# Altium PCB PCB_RoverLite_v1.PcbDoc
Units mm, origin at the board's own origin, x right, y up, seen from the top; angles counter-clockwise.
Board outline 75 x 80 mm, 2 copper layers (Top Layer, Bottom Layer); 22 components, 15 nets, 109 pads, 128 vias.
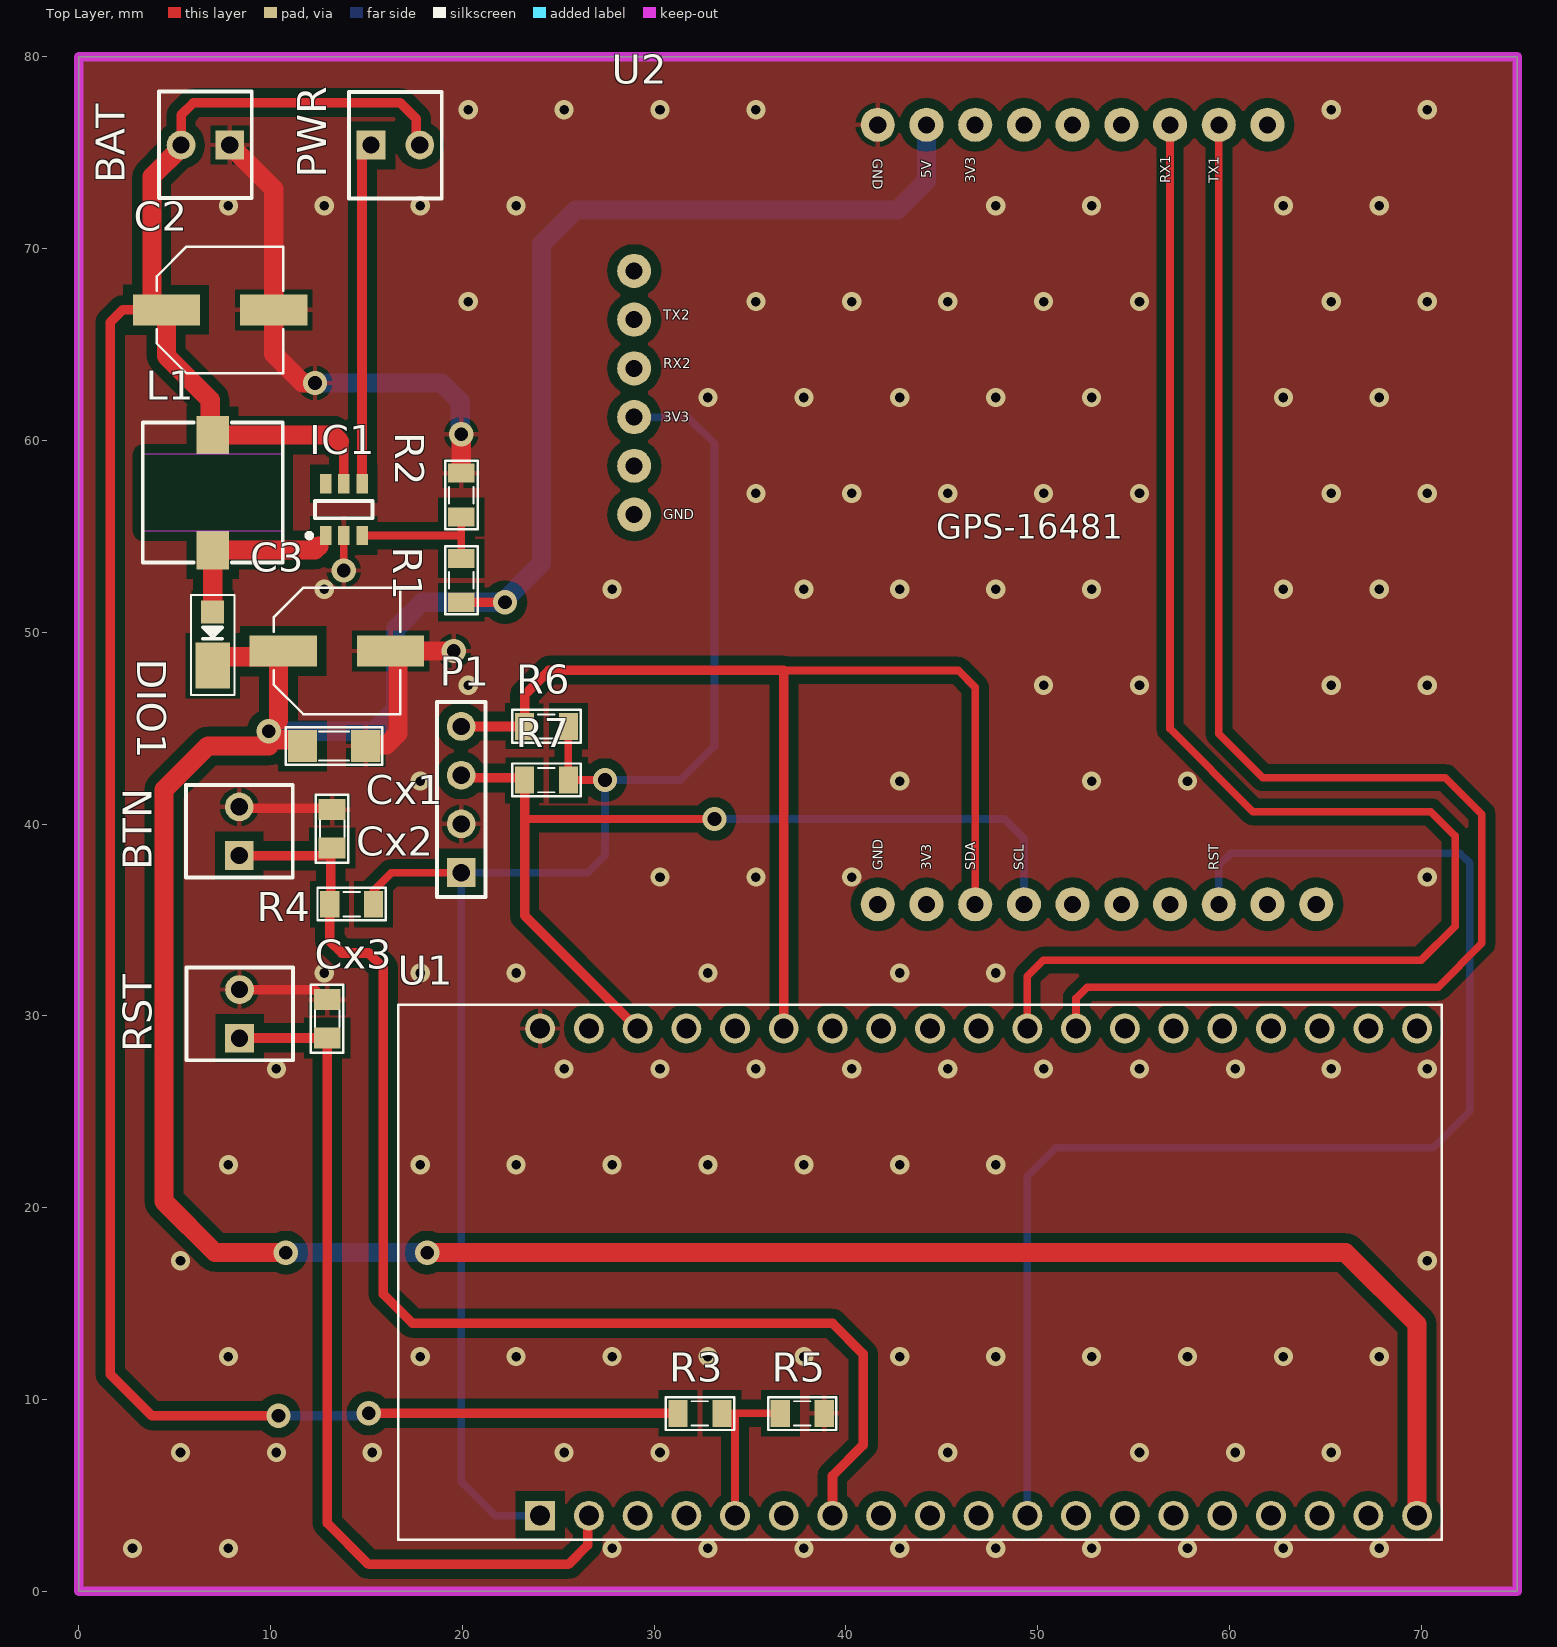
[diagram p0: Top Layer view]
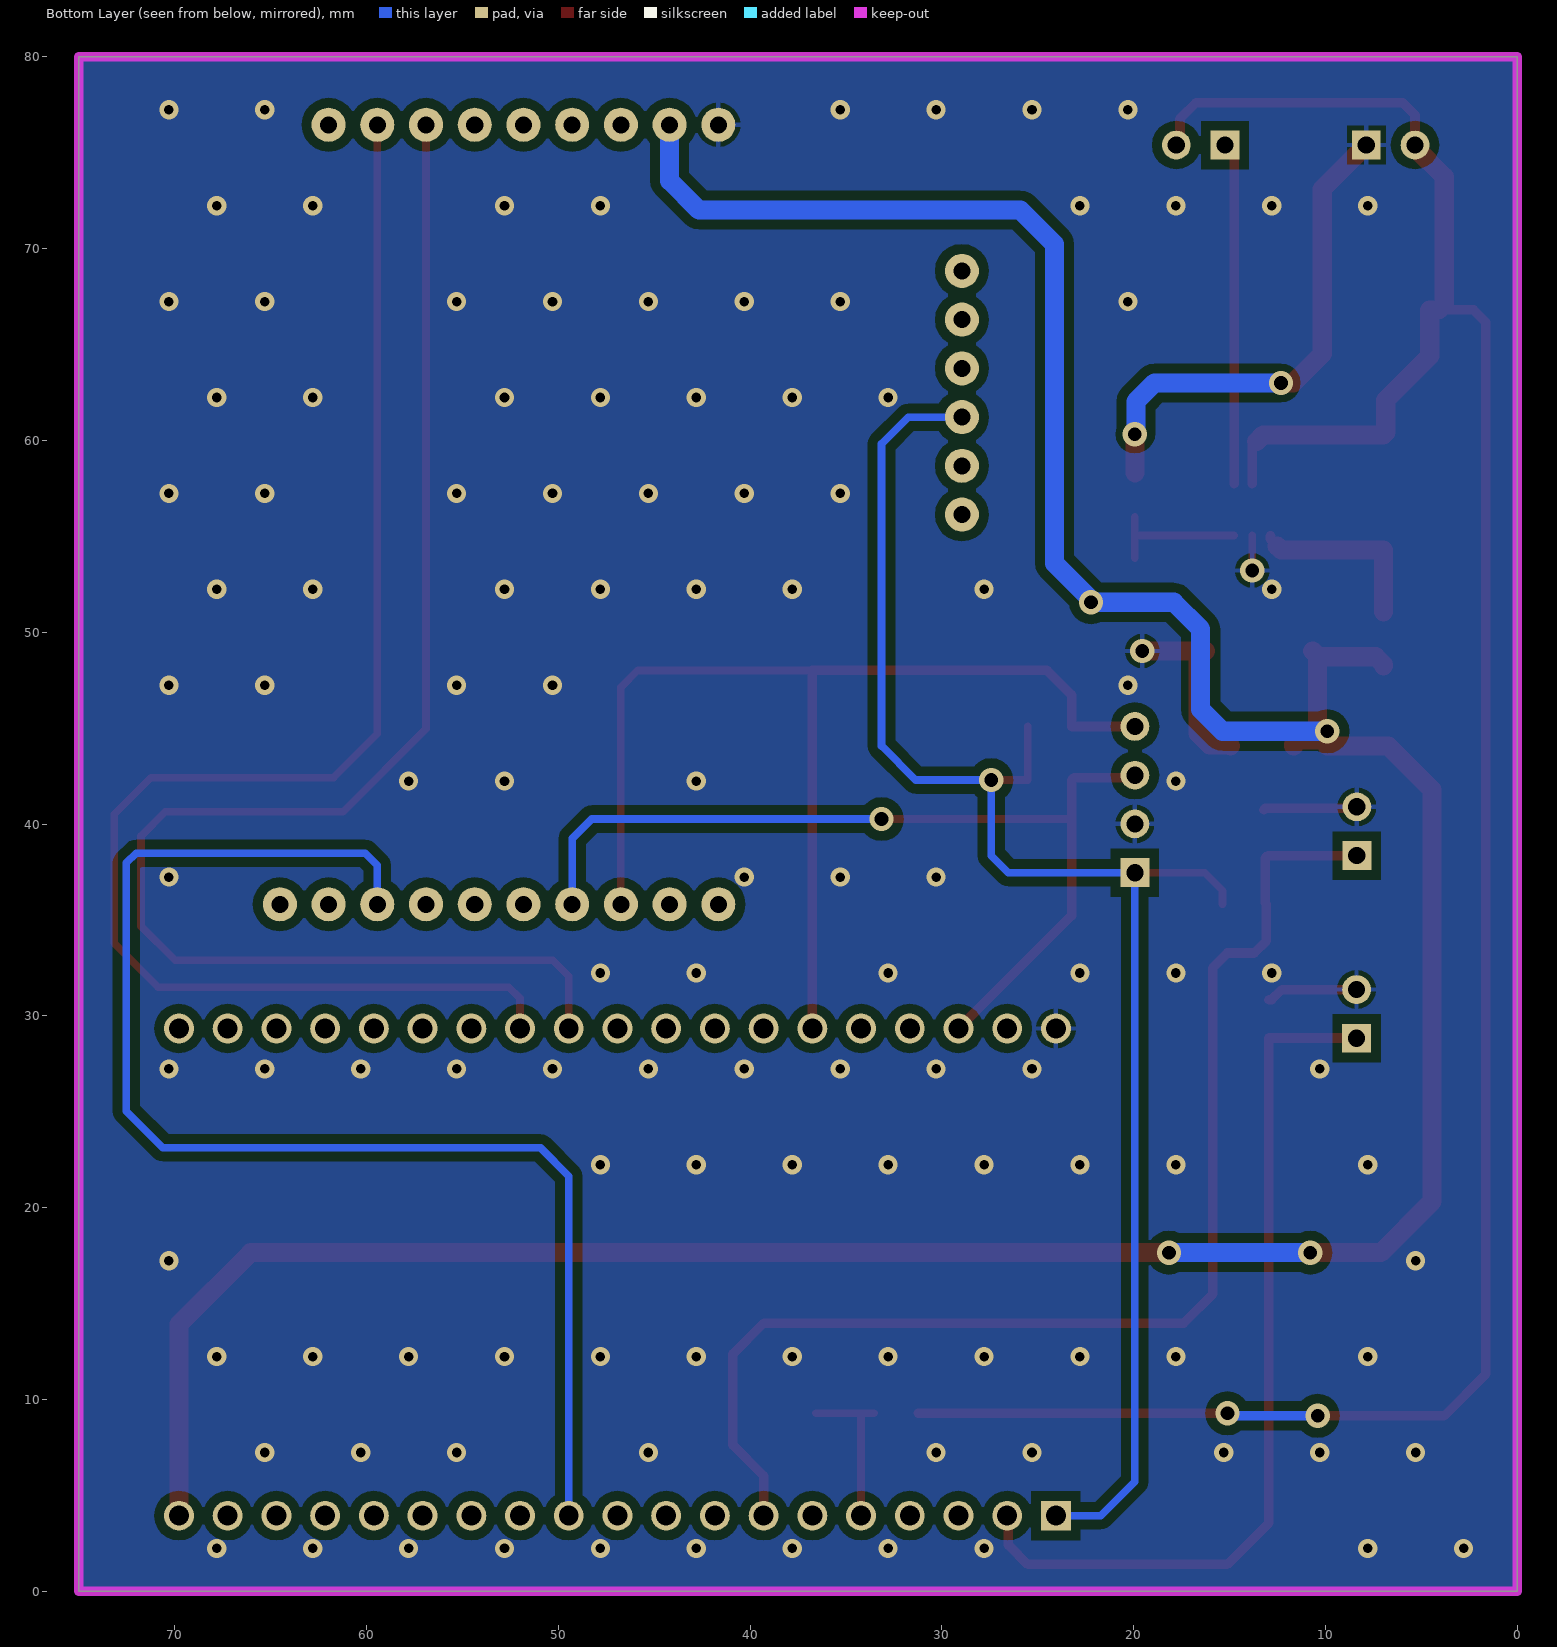
[diagram p1: Bottom Layer view, seen from below]
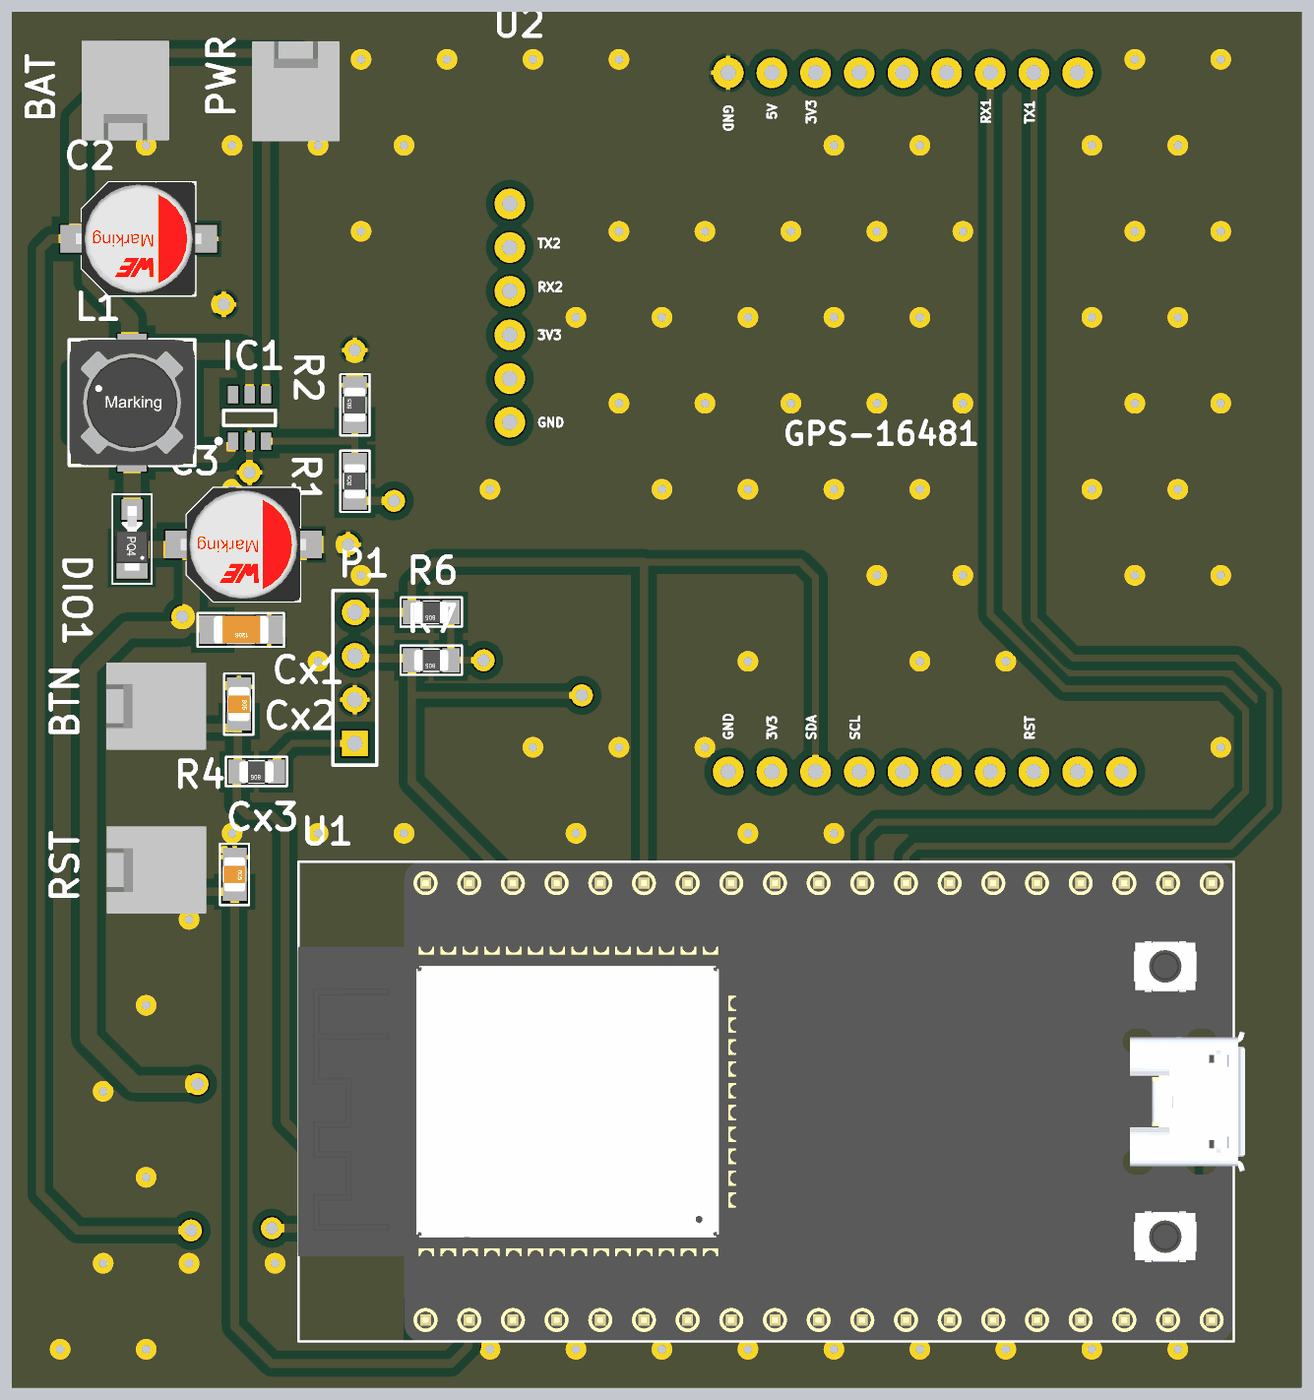
[diagram p2: 3D render of the assembled board from above, using the file's embedded part models]

## Layer stack, top to bottom
Top Solder: solder mask 0.0102, Solder Resist, Dk 3.5
Top Layer: signal copper 0.0356
Dielectric 1: dielectric 0.32, FR-4, Dk 4.8
Bottom Layer: signal copper 0.0356
Bottom Solder: solder mask 0.0102, Solder Resist, Dk 3.5

## Board outline
0,0 0,80 75,80 75,0

## Design rules (kind name [scope] priority, off if disabled: settings)
Clearance [All] p1: gap=0.2 ignorepadtopadclearanceinfootprint=FALSE except(0.5: Arc-Poly Track-Poly SMDPad-Poly THPad-Poly Via-Poly Fill-Poly Poly-Poly)
PolygonConnect [All] p1: connectstyle=Relief reliefconductorwidth=0.254 reliefentries=4 polygonreliefangle="90 Angle" airgapwidth=0.254
RoutingVias [All] p1: holewidth=0.711 width=1.27 viastyle="Through Hole" minholewidth=0.711 minwidth=1.27 maxholewidth=0.711 maxwidth=1.27
SolderMaskExpansion [All] p1: expansion=0.102
Width [All] p1: maxlimit=1 minlimit=0.2 preferedwidth=0.4
30 further rules are at their usual default settings.

## Components (designator, comment, footprint, x,y, rotation, side; value= is the part's Value field where it differs from the comment)
BAT "Bat_in" HDR2 7.874,75.398 r180 top (schematic designator C1)
BTN "cmd btn" HDR2 8.366,38.354 r90 top (schematic designator C5)
C2 "22uF" CAP-ALU-SMD-6.3x7.7x2.2 7.366,66.802 r0 top
C3 "22uF" CAP-ALU-SMD-6.3x7.7x2.2 13.462,49.022 r0 top
Cx1 "104pF" CN-SMD-1206 13.335,44.069 r180 top value=33pF
Cx2 "104pF" CN-SMD-0805 13.208,39.751 r270 top value=33pF
Cx3 "104pF" CN-SMD-0805 12.954,29.845 r270 top value=33pF
DIO1 "SS34" DIO-SMD-216AA 6.985,49.276 r270 top value=1N5007
IC1 "SX1308-Boost 2A" SX1308fpt 13.818,56.388 r90 top
L1 "10 uH" L-SMD-M-7.3x4.5 6.985,57.277 r180 top
P1 "OLED plug" HDR1X4 19.939,37.465 r90 top
PWR "PowerOn/Off" HDR2 15.24,75.398 r0 top (schematic designator C4)
R1 "22k" RES-SMD-0805 19.939,52.705 r90 top
R2 "3k" RES-SMD-0805 19.939,57.15 r90 top
R3 "22k" RES-SMD-0805 32.385,9.271 r0 top
R4 "10k" RES-SMD-0805 14.224,35.814 r180 top
R5 "22k" RES-SMD-0805 37.719,9.271 r0 top
R6 "4k7" RES-SMD-0805 24.384,45.085 r180 top
R7 "4k7" RES-SMD-0805 24.384,42.291 r180 top
RST "RST btn" HDR2 8.382,28.829 r90 top (schematic designator C6)
U1 "ESP32-DEVKITC-32D" MODULE_ESP32-DEVKITC-32D 43.815,16.637 r90 top
U2 "ZED-F9P-SPARKFUN-Breakout board" GPS-16481 27.686,34.544 r0 top

## Footprints (in the part's own frame and the unit in brackets; to place one, negate y for a bottom-side part, rotate by r counter-clockwise, add the part's x,y. Pads: shape width x height; smd on the part's side, far side on the other; paste and mask are expansions set on the pad)
CAP-ALU-SMD-6.3x7.7x2.2 [mm]
  rect 3.5x1.6 smd: 1(-2.8,0) 2(2.8,0)
  silkscreen extent -3.3,-3.3 3.3,3.3, body extent -3.65,-3.3 3.65,3.3, height 7.65
CN-SMD-0805 [mm]
  rect 1.1x1.397 smd: 1(-1,0) 2(1,0)
  silkscreen extent -1.78,-0.86 1.78,0.84, body extent -1,-0.62 1,0.63, height 0.8
CN-SMD-1206 [mil]
  rect 60x65 smd: 1(-64,0) 2(66,0)
  silkscreen extent -98,-38 100,39, body extent -63,-31 63,32, height 40
DIO-SMD-216AA [mm] "DO216AA ST-MITE"
  rect 1.2x1.2 smd: 1(-1.778,0)
  rect 2.4x1.8 smd: 2(1.022,0)
  silkscreen extent -2.67,-1.14 2.54,1.14, body extent -1.99,-0.95 1.77,0.95, height 1.02
GPS-16481 [mil]
  round 70 hole 35: 1(550,1650) 2(650,1650) 3(750,1650) 4(850,1650) 5(950,1650) 6(1050,1650) 7(1150,1650) 8(1250,1650) 9(1350,1650) 10(1450,50) 11(1350,50) 12(1250,50) 13(1150,50) 14(1050,50) 15(950,50) 16(850,50) 17(750,50) 18(650,50) 19(550,50) 20(50,850) 21(50,950) 22(50,1050) 23(50,1150) 24(50,1250) 25(50,1350)
HDR1X4 [mm] "Connector; Header; 4 Position"
  rect 1.5x1.5 hole 0.9: 1(0,0)
  round 1.5 hole 0.9: 2(2.54,0) 3(5.08,0) 4(7.62,0)
  silkscreen extent -1.27,-1.27 8.89,1.27
HDR2 [mm] "Connector; Header; 2 Position"
  rect 1.5x1.5 hole 0.9: 1(0,0)
  round 1.5 hole 0.9: 2(2.54,0)
  silkscreen extent -1.14,-2.79 3.68,2.77, body extent -1.27,-2.92 3.81,2.88, height 11.72
L-SMD-M-7.3x4.5 [mm] "WE-PDA SMD Shielded Power Inductor, 7345"
  rect 1.7x2 smd: 1(0,3) 2(0,-3)
  Top Layer keep-out region: -3.65,-2 3.65,-2 3.65,2 -3.65,2
  silkscreen extent -3.65,-3.65 3.65,3.65, body extent -3.65,-3.65 3.65,3.65, height 4.05
MODULE_ESP32-DEVKITC-32D [mm]
  rect 1.56x1.56 hole 1.04: 1(-12.7,19.76)
  round 1.56 hole 1.04: 2(-12.7,17.22) 3(-12.7,14.68) 4(-12.7,12.14) 5(-12.7,9.6) 6(-12.7,7.06) 7(-12.7,4.52) 8(-12.7,1.98) 9(-12.7,-0.56) 10(-12.7,-3.1) 11(-12.7,-5.64) 12(-12.7,-8.18) 13(-12.7,-10.72) 14(-12.7,-13.26) 15(-12.7,-15.8) 16(-12.7,-18.34) 17(-12.7,-20.88) 18(-12.7,-23.42) 19(-12.7,-25.96) 20(12.7,19.76) 21(12.7,17.22) 22(12.7,14.68) 23(12.7,12.14) 24(12.7,9.6) 25(12.7,7.06) 26(12.7,4.52) 27(12.7,1.98) 28(12.7,-0.56) 29(12.7,-3.1) 30(12.7,-5.64) 31(12.7,-8.18) 32(12.7,-10.72) 33(12.7,-13.26) 34(12.7,-15.8) 35(12.7,-18.34) 36(12.7,-20.88) 37(12.7,-23.42) 38(12.7,-25.96)
  silkscreen extent -13.95,-27.25 13.95,27.15, body extent -13.97,-27.9 13.97,27.2, height 3.25
RES-SMD-0805 [mil]
  rect 39.37x55 smd: 1(-45,0) 2(45,0)
  silkscreen extent -70,-34 70,33, body extent -39,-25 39,25, height 31
SX1308fpt [mm] "SOT23, 6-Leads, Body 2.90x2.80mm, Pitch 0.95mm, IPC Medium Density"
  rect 1x0.6 smd: 1(-1.35,0.95) 2(-1.35,0) 3(-1.35,-0.95) 4(1.35,-0.95) 5(1.35,0) 6(1.35,0.95)
  silkscreen extent -1.47,-1.5 0.45,1.92, body extent -0.85,-1.5 0.85,1.5, height 1.45

## Part data
BAT BTN PWR RST: library part Header2, "Header IDC, 2 x 1 Pin Vertical 2.54mm Pitch (Non-Boxed, Male)", Manufacturer="Würth Elektronik eiSos GmbH", partNo=613002143121, ComponentLink1 Description=Manufacturer, ComponentLink1URL=http://www.we-online.com, ComponentLink2 Description=Datasheet, ComponentLink2URL=http://katalog.we-online.de/em/datasheet/6130xx143121.pdf, Created by="Karrer Zheng", Created Date="29 March 2013", NoPins=02
C2 C3: library part CN-ALU-SMD, "Polarized Capacitor (Axial)", LatestRevisionDate=17-Jul-2002, LatestRevisionNote="Re-released for DXP Platform.", PackageReference=POLAR0.8, Published=8-Jun-2000, Publisher="Altium Limited"
Cx1 Cx2 Cx3: library part CN
DIO1: library part "Diode SMD", "Default Diode", Code - JEDEC=DO-214-AB, Published=8-Jun-2000, Publisher="Altium Limited", Revision="July-2002: Re-released for DXP Platform."
L1: library part L-SMD-1, Inductance="1.0 礖", Manufacturer="Wurth Elektronik", partNo=78477010, ComponentLink1Description=Manufacturer, ComponentLink1URL=http://www.we-online.de, ComponentLink2Description=Datasheet, ComponentLink2URL=http://katalog.we-online.de/pbs/datasheet/78477010.pdf, Created by="Baojun Chen", Created Date=Nov.2015
P1: library part "Header 4", "Header, 4-Pin", LatestRevisionDate=17-Jul-2002, LatestRevisionNote="Re-released for DXP Platform.", Publisher="Altium Limited"
R1 R2 R3 R4 R5 R6 R7: library part Res-SMD, "Resistor", Manufacturer="Generic Components", Class=Passive, Published=08/06/2000, Publisher="Altium Hobart Technology Centre"
U1: "EVAL BOARD FOR ESP-WROOM-32", Package=None, Availability=Warning, Check_prices=https://www.snapeda.com/parts/ESP32-DEVKITC-32D/Espressif%20Systems/view-part/2777395/?ref=eda, MF="Espressif Systems", MP=ESP32-DEVKITC-32D, Price=None, Purchase-URL=https://pricing.snapeda.com/search/part/ESP32-DEVKITC-32D/?ref=eda, SnapEDA_Link=https://www.snapeda.com/parts/ESP32-DEVKITC-32D/Espressif%20Systems/view-part/2777395/?ref=snap

## Via types
v1: diameter 1, hole 0.5, Top Layer to Bottom Layer, 116 vias
v2: diameter 1.27, hole 0.711, Top Layer to Bottom Layer, 12 vias

## Nets (pads, with @x,y where several pads share a name; then routed paths per layer and width w, separated by ;. In a path a pad name is that pad's centre, name@x,y a point inside that pad or via, vN(x,y) a via of type N, cw(c..) or ccw(c..) an arc to the next point about the centre after c; other vN are vias at no path point)
3V3: P1.1 R4.1 R6.1 R7.1 U1.1 U2.22 | length 85.7
  Top Layer w0.4: R4.1 15.367,36.527 16.305,37.465 P1.1 ; R6.1 R7.1 v2(27.432,42.291)
  Bottom Layer w0.4: U1.1 21.717,3.937 19.939,5.715 P1.1 26.543,37.465 27.432,38.354 v2(27.432,42.291) 31.369,42.291 33.147,44.069 33.147,59.817 31.75,61.214 U2.22
5V: C3.1 Cx1.2 DIO1.2 R1.1 U1.19 U2.2 | length 178.9
  Top Layer w0.5: R1.1 v2(22.225,51.562)
  Top Layer w1: DIO1.2 6.985,48.322 7.385,48.722 10.362,48.722 C3.1@10.414,48.774 ; 9.906,44.069 6.731,44.069 4.445,41.783 4.445,20.32 7.112,17.653 v2(10.795,17.653) ; v2(9.906,44.831) 9.979,44.831 10.416,44.394 11.397,44.394 11.659,44.133 Cx1.2 ; 10.414,45.377 C3.1@10.414,48.774 ; C3.1 C3.1@10.414,48.774 ; v2(18.161,17.653) 66.04,17.653 69.775,13.918 U1.19
  Bottom Layer w1: v2(9.906,44.831) 15.367,44.831 16.51,45.974 16.51,50.165 17.907,51.562 v2@22.098,51.562 ; v2(10.795,17.653) v2(18.161,17.653) ; v2@22.162,51.625 24.13,53.594 24.13,70.231 25.908,72.009 42.672,72.009 44.196,73.533 U2.2
ADC1-CH6/Vbaterry: R3.2 R5.1 U1.5 | length 8.4
  Top Layer w0.4: R3.2 34.29,9.271 ; U1.5 34.215,9.196 34.29,9.271 ; R5.1 34.29,9.271
CMD_BTN: BTN.1 Cx2.2 R4.2 U1.7 | length 65
  Top Layer w0.5: BTN.1 13.018,38.354 13.145,38.227 13.145,35.878 R4.2 13.081,33.909 13.716,33.274 15.113,33.274 15.875,32.512 15.875,15.494 17.399,13.97 39.295,13.97 40.894,12.371 40.894,7.62 39.295,6.021 U1.7
ESP_RST: Cx3.2 RST.1 U1.2 | length 46.3
  Top Layer w0.5: RST.1 8.398,28.845 Cx3.2 12.954,3.556 15.113,1.397 25.527,1.397 26.537,2.407 26.537,3.879 U1.2
ESP_UART1_RX/F9P_UART1_TX: U1.31 U2.8 | length 77.9
  Top Layer w0.4: U1.31 51.995,30.913 52.578,31.496 70.866,31.496 73.152,33.782 73.152,40.513 71.247,42.418 61.722,42.418 59.436,44.704 U2.8
ESP_UART1_TX/F9P_UART1_RX: U1.30 U2.7 | length 79.5
  Top Layer w0.4: U1.30 49.455,32.056 50.292,32.893 69.977,32.893 71.755,34.671 71.755,39.37 70.485,40.64 61.214,40.64 56.896,44.958 U2.7
F9P_RST: U1.11 U2.12 | length 70.7
  Bottom Layer w0.4: U1.11 49.455,21.642 50.927,23.114 70.612,23.114 72.517,25.019 72.517,37.973 72.009,38.481 60.071,38.481 59.436,37.846 U2.12
FB: IC1.3 R1.2 R2.1 | length 7.4
  Top Layer w0.4: IC1.3 19.828,55.038 19.939,54.927 ; R1.2 19.939,54.927 ; R2.1 19.939,54.927
GND: BAT.1 BTN.2 C2.2 C3.2 Cx1.1 Cx2.1 Cx3.1 IC1.2 P1.2 R2.2 R5.2 RST.2 U1.20 U2.1 | length 47.5
  Top Layer w0.4: v2(13.818,53.213) IC1.2
  Top Layer w0.5: BTN.2 8.437,40.822 13.137,40.822 Cx2.1 ; RST.2 12.282,31.369 12.806,30.845 Cx3.1
  Top Layer w1: BAT.1 10.166,73.106 C2.2 10.166,64.502 11.676,62.992 v2(12.319,62.992) ; Cx1.1 15.024,44.133 16.051,44.133 16.637,44.718 16.637,48.722 C3.2@16.337,49.022 ; C3.2 C3.2@16.337,49.022 ; v2(19.558,49.022) C3.2@16.337,49.022 ; R2.2 v2(19.939,60.325)
  Bottom Layer w1: v2(12.319,62.992) 18.923,62.992 19.887,62.028 19.887,60.377 v2(19.939,60.325)
  other v1: 2.803,2.234 7.803,2.234 27.803,2.234 32.803,2.234 37.803,2.234 42.803,2.234 47.803,2.234 52.803,2.234 57.803,2.234 62.803,2.234 67.803,2.234 5.303,7.234 10.303,7.234 15.303,7.234 25.303,7.234 30.303,7.234 45.303,7.234 55.303,7.234 60.303,7.234 65.303,7.234 7.803,12.234 17.803,12.234 22.803,12.234 27.803,12.234 32.803,12.234 37.803,12.234 42.803,12.234 47.803,12.234 52.803,12.234 57.803,12.234 62.803,12.234 67.803,12.234 5.303,17.234 70.303,17.234 7.803,22.234 17.803,22.234 22.803,22.234 27.803,22.234 32.803,22.234 37.803,22.234 42.803,22.234 47.803,22.234 10.303,27.234 25.303,27.234 30.303,27.234 35.303,27.234 40.303,27.234 45.303,27.234 50.303,27.234 55.303,27.234 60.303,27.234 65.303,27.234 70.303,27.234 12.803,32.234 17.803,32.234 22.803,32.234 32.803,32.234 42.803,32.234 47.803,32.234 30.303,37.234 35.303,37.234 40.303,37.234 70.303,37.234 17.803,42.234 42.803,42.234 52.803,42.234 57.803,42.234 20.303,47.234 50.303,47.234 55.303,47.234 65.303,47.234 70.303,47.234 12.803,52.234 27.803,52.234 37.803,52.234 42.803,52.234 47.803,52.234 52.803,52.234 62.803,52.234 67.803,52.234 35.303,57.234 40.303,57.234 45.303,57.234 50.303,57.234 55.303,57.234 65.303,57.234 70.303,57.234 32.803,62.234 37.803,62.234 42.803,62.234 47.803,62.234 52.803,62.234 62.803,62.234 67.803,62.234 20.303,67.234 35.303,67.234 40.303,67.234 45.303,67.234 50.303,67.234 55.303,67.234 65.303,67.234 70.303,67.234 7.803,72.234 12.803,72.234 17.803,72.234 22.803,72.234 47.803,72.234 52.803,72.234 62.803,72.234 67.803,72.234 20.303,77.234 25.303,77.234 30.303,77.234 35.303,77.234 65.303,77.234 70.303,77.234
I2CBUS_SCL: P1.3 R7.2 U1.22 U2.16 | length 48.7
  Top Layer w0.4: 23.241,40.259 v2(33.147,40.259)
  Top Layer w0.5: P1.3 20.066,42.418 23.114,42.418 R7.2 23.241,40.259 23.241,35.231 U1.22
  Bottom Layer w0.4: v2(33.147,40.259) 48.26,40.259 49.276,39.243 U2.16
I2CBUS_SDA: P1.4 R6.2 U1.25 U2.17 | length 59.3
  Top Layer w0.4: 36.755,48.006 45.847,48.006 46.736,47.117 U2.17
  Top Layer w0.5: P1.4 R6.2 23.241,46.736 24.511,48.006 36.755,48.006 U1.25
NetC4_1: IC1.4 PWR.1 | length 17.9
  Top Layer w0.5: IC1.4 14.768,74.926 PWR.1
NetDIO1_1: DIO1.1 IC1.1 L1.1 | length 9.5
  Top Layer w0.5: 12.513,54.483 12.868,54.838 IC1.1
  Top Layer w1: DIO1.1 L1.1 12.307,54.277 12.513,54.483
V_bat: BAT.2 C2.1 IC1.5 L1.2 PWR.2 R3.1 | length 130.4
  Top Layer w0.5: C2.1@4.11,66.802 2.286,66.802 1.651,66.167 1.651,11.303 3.81,9.144 v2(10.414,9.144) ; BAT.2 5.334,76.962 5.969,77.597 16.764,77.597 17.589,76.772 17.589,75.589 PWR.2 ; 13.589,59.944 13.818,59.715 IC1.5 ; v2(15.113,9.271) R3.1
  Top Layer w1: BAT.2 5.334,75.264 3.81,73.74 3.81,67.102 4.11,66.802 C2.1 4.566,64.395 6.858,62.103 6.858,60.404 L1.2 13.256,60.277 13.589,59.944
  Bottom Layer w0.5: v2(10.414,9.144) 14.986,9.144 v2(15.113,9.271)
pads on no net: IC1.6 U1.3 U1.4 U1.6 U1.8 U1.9 U1.10 U1.12 U1.13 U1.14 U1.15 U1.16 U1.17 U1.18 U1.21 U1.23 U1.24 U1.26 U1.27 U1.28 U1.29 U1.32 U1.33 U1.34 U1.35 U1.36 U1.37 U1.38 U2.3 U2.4 U2.5 U2.6 U2.9 U2.10 U2.11 U2.13 U2.14 U2.15 U2.18 U2.19 U2.20 U2.21 U2.23 U2.24 U2.25

## Polygon pours and split planes (outlines as drawn)
GND on Top Layer "Top Layer-GND" (solid, pour order 0): 0,0 75,0 75,80 0,80
GND on Bottom Layer "Bottom Layer-GND" (solid, pour order 2): 0,0 75,0 75,80 0,80

## Keep-outs
Keep-Out Layer:
  the board outline again, w0.5

## Silkscreen, mask and mechanical layers (free items; w line width, h text height)
Mechanical 1:
  the board outline again, w0.254

## Text inside footprints (layer, text, board x,y; h text height)
U2: Top Overlay "RX2" at 30.48,63.754 h0.51; Top Overlay "TX2" at 30.48,66.294 h0.51; Top Overlay "RST" at 59.436,37.592 h0.51 r90; Top Overlay "SCL" at 49.276,37.592 h0.51 r90; Top Overlay "SDA" at 46.736,37.592 h0.51 r90; Top Overlay "RX1" at 56.896,73.406 h0.51 r90; Top Overlay "TX1" at 59.436,73.406 h0.51 r90; Top Overlay "3V3" at 44.45,37.592 h0.51 r90; Top Overlay "3V3" at 30.48,60.96 h0.51; Top Overlay "3V3" at 46.736,73.406 h0.51 r90; Top Overlay "5V" at 44.45,73.66 h0.51 r90; Top Overlay "GND" at 41.91,37.592 h0.51 r90; Top Overlay "GND" at 30.48,55.88 h0.51; Top Overlay "GND" at 41.402,74.676 h0.51 r270; Top Overlay "GPS-16481" at 44.704,54.864 h1.27